# Altium PCB MCU.PcbDoc
Units mil, origin at the board's own origin, x right, y up, seen from the top; angles counter-clockwise.
Board outline 2250 x 3635 mil, 2 copper layers (Top Layer, Bottom Layer); 21 components, 89 nets, 325 pads, 0 vias.
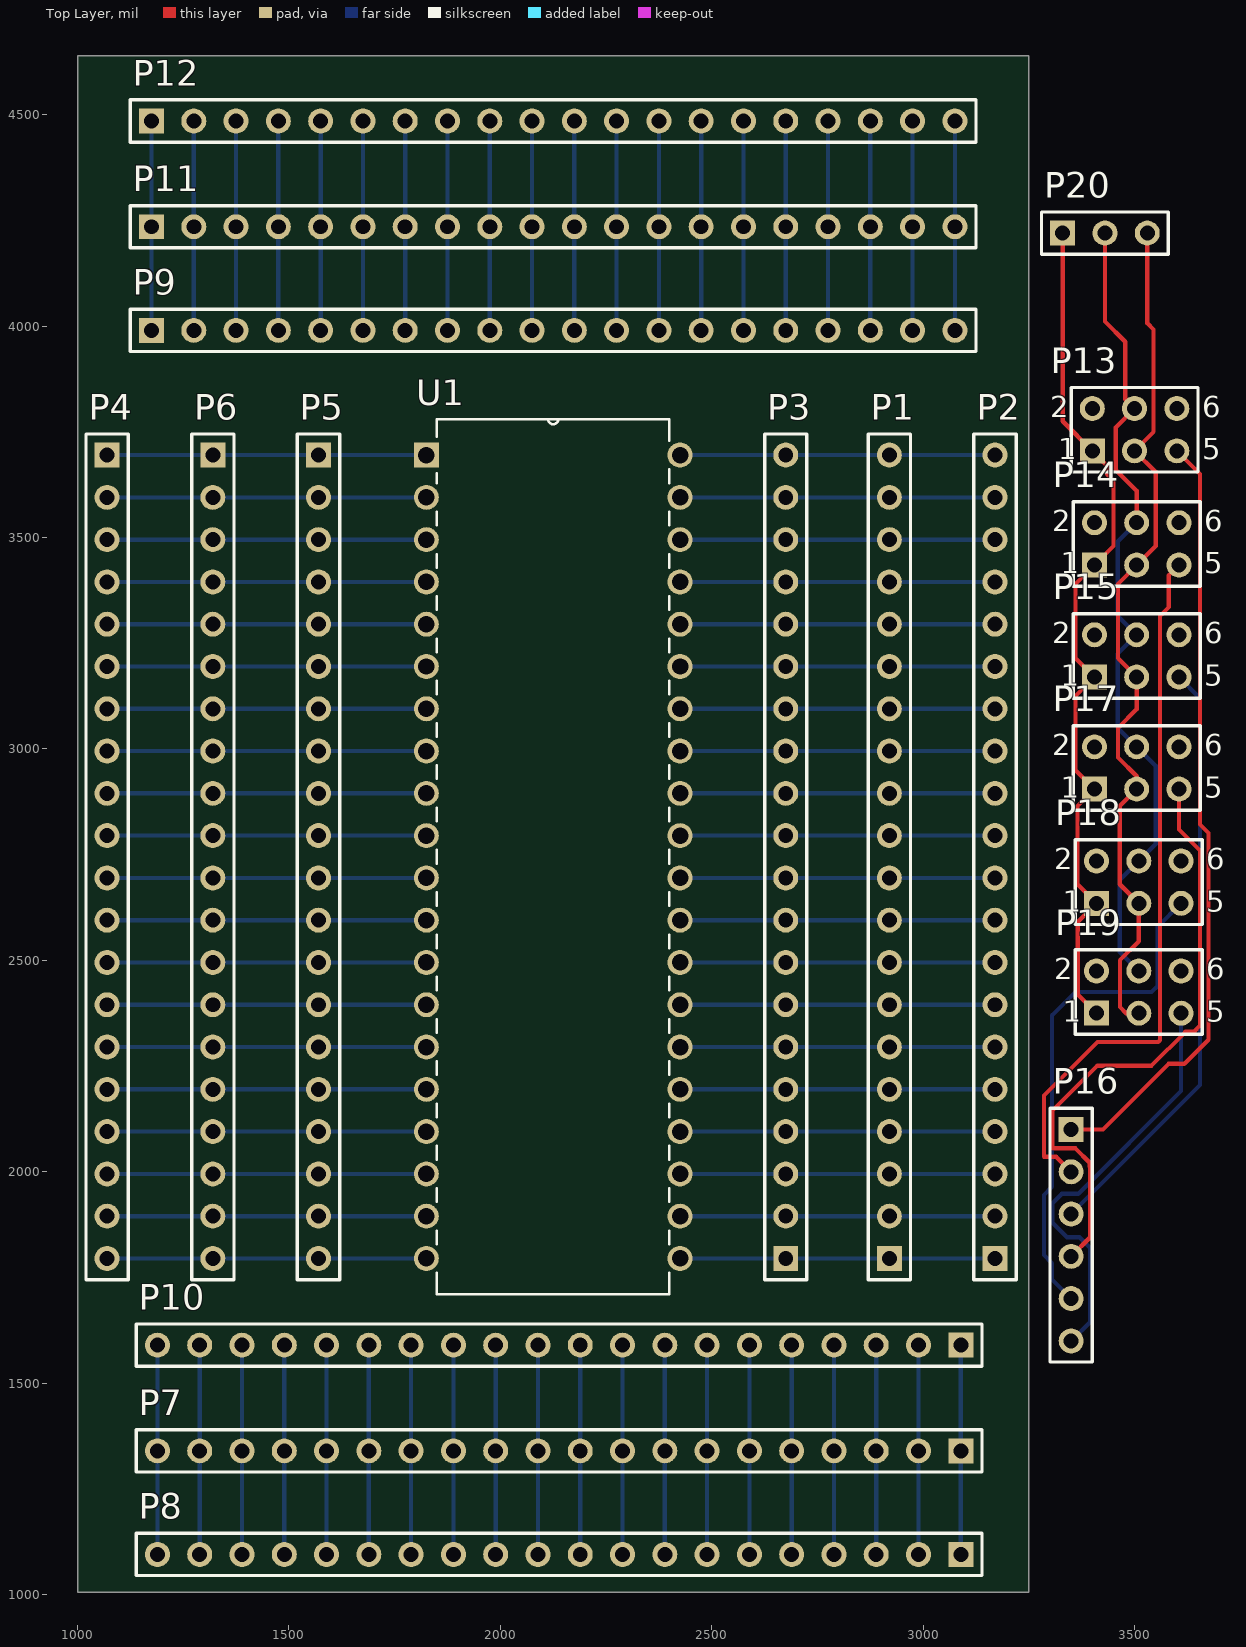
[diagram p0: Top Layer view]
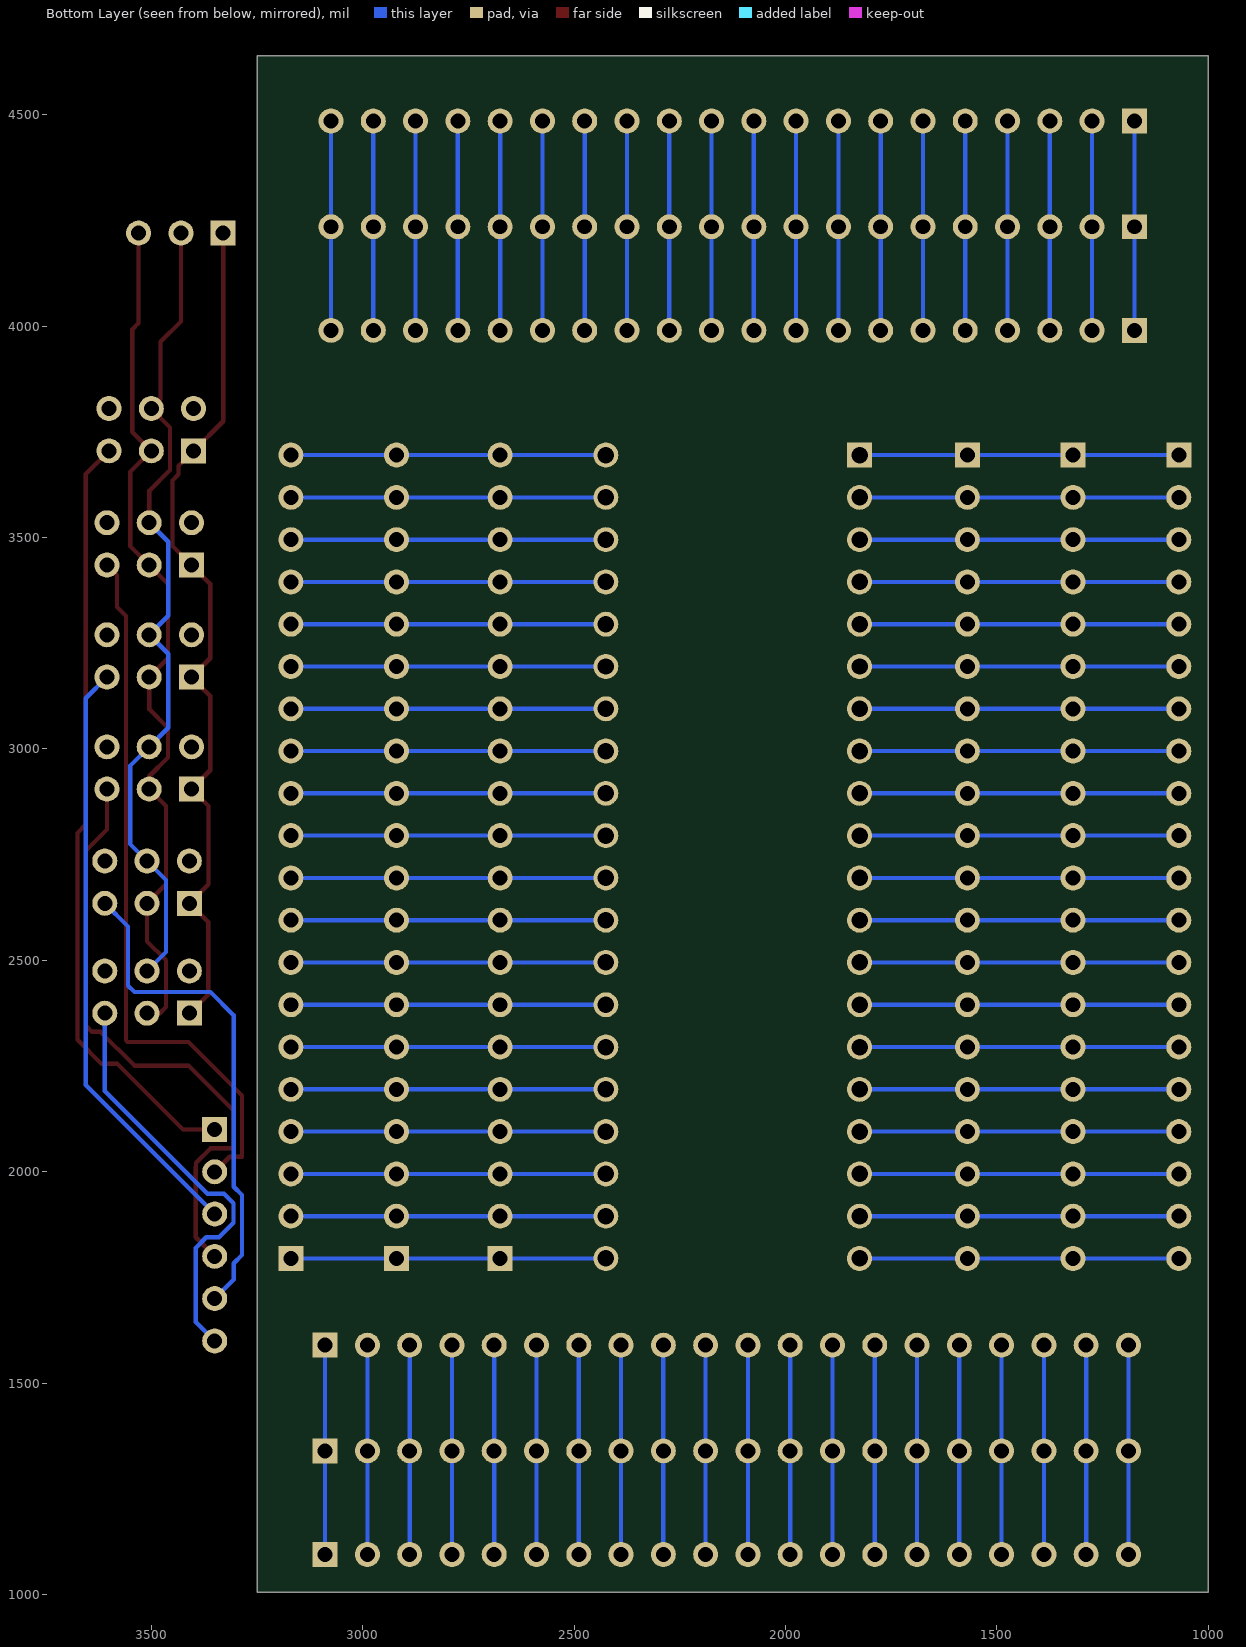
[diagram p1: Bottom Layer view, seen from below]

## Layer stack, top to bottom
Top Solder: solder mask 0.4, Solder Resist, Dk 3.5
Top Layer: signal copper 1.4
Dielectric 1: dielectric 12.6, FR-4, Dk 4.8
Bottom Layer: signal copper 1.4
Bottom Solder: solder mask 0.4, Solder Resist, Dk 3.5

## Board outline
1000,1005 1000,4640 3250,4640 3250,1005

## Design rules (kind name [scope] priority, off if disabled: settings)
Clearance [All] p1: gap=10
PolygonConnect [All] p1: connectstyle=Relief reliefconductorwidth=10 reliefentries=4 polygonreliefangle="90 Angle" airgapwidth=10
RoomDefinition MCU [InComponentClass('MCU')] p1: confinementstyle=ConfineIn formatcopy=TRUE lockcomponents=FALSE outline 1000,1030 3805,1030 3805,4650 1000,4650
RoutingVias [All] p1: holewidth=28 width=50 viastyle="Through Hole" minholewidth=28 minwidth=50 maxholewidth=28 maxwidth=50
SolderMaskExpansion [All] p1: expansion=4
Width [All] p1: maxlimit=10 minlimit=10 preferedwidth=10
30 further rules are at their usual default settings.

## Components (designator, comment, footprint, x,y, rotation, side; value= is the part's Value field where it differs from the comment)
P1 "Header 20" HDR1X20 2920,1795 r90 top
P2 "Header 20" HDR1X20 3170,1795 r90 top
P3 "Header 20" HDR1X20 2675,1795 r90 top
P4 "Header 20" HDR1X20 1070,3695 r270 top
P5 "Header 20" HDR1X20 1570,3695 r270 top
P6 "Header 20" HDR1X20 1320,3695 r270 top
P7 "Header 20" HDR1X20 3089,1340 r180 top
P8 "Header 20" HDR1X20 3089,1095 r180 top
P9 "Header 20" HDR1X20 1175,3990 r0 top
P10 "Header 20" HDR1X20 3089,1590 r180 top
P11 "Header 20" HDR1X20 1175,4235 r0 top
P12 "Header 20" HDR1X20 1175,4485 r0 top
P13 "Header 3X2" HDR2X3 3400,3705 r0 top
P14 "Header 3X2" HDR2X3 3405,3435 r0 top
P15 "Header 3X2" HDR2X3 3405,3170 r0 top
P16 "Header 6" HDR1X6 3350,2100 r270 top
P17 "Header 3X2" HDR2X3 3405,2905 r0 top
P18 "Header 3X2" HDR2X3 3410,2635 r0 top
P19 "Header 3X2" HDR2X3 3410,2375 r0 top
P20 "Header 3" HDR1X3 3330,4220 r0 top
U1 "ATMEGA1284P-PU" DIP254P1524X483-40_ATMEGA1284P-PU(Primary) 2425,1795 r0 top

## Footprints (in the part's own frame and the unit in brackets; to place one, negate y for a bottom-side part, rotate by r counter-clockwise, add the part's x,y. Pads: shape width x height; smd on the part's side, far side on the other; paste and mask are expansions set on the pad)
DIP254P1524X483-40_ATMEGA1284P-PU(Primary) [mil]
  rect 59x59 hole 39 mask-1000: 1(-600,1900)
  round 59 hole 39 mask-1000: 2(-600,1800) 3(-600,1700) 4(-600,1600) 5(-600,1500) 6(-600,1400) 7(-600,1300) 9(-600,1100) 10(-600,1000) 11(-600,900) 12(-600,800) 13(-600,700) 14(-600,600) 15(-600,500) 16(-600,400) 17(-600,300) 18(-600,200) 19(-600,100) 20(-600,0) 21(0,0) 22(0,100) 23(0,200) 24(0,300) 25(0,400) 26(0,500) 27(0,600) 28(0,700) 29(0,800) 30(0,900) 31(0,1000) 32(0,1100) 33(0,1200) 34(0,1300) 35(0,1400) 36(0,1500) 37(0,1600) 38(0,1700) 39(0,1800) 40(0,1900)
  round 59 hole 39: 8(-600,1200)
  silkscreen extent -575,-85 -25,1985
HDR1X3 [mm] "Connector; Header; 3 Position"
  rect 1.5x1.5 hole 0.9: 1(0,0)
  round 1.5 hole 0.9: 2(2.54,0) 3(5.08,0)
  silkscreen extent -1.27,-1.27 6.35,1.27
HDR1X6 [mm] "Connector; Header; 6 Position"
  rect 1.5x1.5 hole 0.9: 1(0,0)
  round 1.5 hole 0.9: 2(2.54,0) 3(5.08,0) 4(7.62,0) 5(10.16,0) 6(12.7,0)
  silkscreen extent -1.27,-1.27 13.97,1.27
HDR1X20 [mm] "Connector; Header; 20 Position"
  rect 1.5x1.5 hole 0.9: 1(0,0)
  round 1.5 hole 0.9: 2(2.54,0) 3(5.08,0) 4(7.62,0) 5(10.16,0) 6(12.7,0) 7(15.24,0) 8(17.78,0) 9(20.32,0) 10(22.86,0) 11(25.4,0) 12(27.94,0) 13(30.48,0) 14(33.02,0) 15(35.56,0) 16(38.1,0) 17(40.64,0) 18(43.18,0) 19(45.72,0) 20(48.26,0)
  silkscreen extent -1.27,-1.27 49.53,1.27
HDR2X3 [mm] "Connector; Header; 3x2 Position"
  rect 1.5x1.5 hole 0.9: 1(0,0)
  round 1.5 hole 0.9: 2(0,2.54) 3(2.54,0) 4(2.54,2.54) 5(5.08,0) 6(5.08,2.54)
  silkscreen extent -1.27,-1.27 6.35,3.81

## Part data
P1 P2 P3 P4 P5 P6 P7 P8 P9 P10 P11 P12: "Header, 20-Pin"
P13 P14 P15 P17 P18 P19: "Header, 3-Pin, Dual row"
P16: "Header, 6-Pin"
P20: "Header, 3-Pin"

## Nets (pads, with @x,y where several pads share a name; then routed paths per layer and width w, separated by ;. In a path a pad name is that pad's centre, name@x,y a point inside that pad or via, vN(x,y) a via of type N, cw(c..) or ccw(c..) an arc to the next point about the centre after c; other vN are vias at no path point)
NetP1_1: P1.1 P2.1 P3.1 U1.21 | length 745
  Bottom Layer w10: U1.21 P3.1 P1.1 P2.1
NetP1_2: P1.2 P2.2 P3.2 | length 495
  Bottom Layer w10: P3.2 P1.2 P2.2
NetP1_3: P1.3 P2.3 P3.3 U1.23 | length 745
  Bottom Layer w10: U1.23 P3.3 P1.3 P2.3
NetP1_4: P1.4 P2.4 P3.4 U1.24 | length 745
  Bottom Layer w10: U1.24 P3.4 P1.4 P2.4
NetP1_5: P1.5 P2.5 P3.5 U1.25 | length 745
  Bottom Layer w10: U1.25 P3.5 P1.5 P2.5
NetP1_6: P1.6 P2.6 P3.6 U1.26 | length 745
  Bottom Layer w10: U1.26 P3.6 P1.6 P2.6
NetP1_7: P1.7 P2.7 P3.7 | length 495
  Bottom Layer w10: P3.7 P1.7 P2.7
NetP1_8: P1.8 P2.8 P3.8 U1.28 | length 745
  Bottom Layer w10: U1.28 P3.8 P1.8 P2.8
NetP1_9: P1.9 P2.9 P3.9 U1.29 | length 745
  Bottom Layer w10: U1.29 P3.9 P1.9 P2.9
NetP1_10: P1.10 P2.10 P3.10 U1.30 | length 745
  Bottom Layer w10: U1.30 P3.10 P1.10 P2.10
NetP1_11: P1.11 P2.11 P3.11 U1.31 | length 745
  Bottom Layer w10: U1.31 P3.11 P1.11 P2.11
NetP1_12: P1.12 P2.12 P3.12 U1.32 | length 745
  Bottom Layer w10: U1.32 P3.12 P1.12 P2.12
NetP1_13: P1.13 P2.13 P3.13 U1.33 | length 745
  Bottom Layer w10: U1.33 P3.13 P1.13 P2.13
NetP1_14: P1.14 P2.14 P3.14 U1.34 | length 745
  Bottom Layer w10: U1.34 P3.14 P1.14 P2.14
NetP1_15: P1.15 P2.15 P3.15 U1.35 | length 745
  Bottom Layer w10: U1.35 P3.15 P1.15 P2.15
NetP1_16: P1.16 P2.16 P3.16 U1.36 | length 745
  Bottom Layer w10: U1.36 P3.16 P1.16 P2.16
NetP1_17: P1.17 P2.17 P3.17 U1.37 | length 745
  Bottom Layer w10: U1.37 P3.17 P1.17 P2.17
NetP1_18: P1.18 P2.18 P3.18 | length 495
  Bottom Layer w10: P3.18 P1.18 P2.18
NetP1_19: P1.19 P2.19 P3.19 U1.39 | length 745
  Bottom Layer w10: U1.39 P3.19 P1.19 P2.19
NetP1_20: P1.20 P2.20 P3.20 | length 495
  Bottom Layer w10: P3.20 P1.20 P2.20
NetP4_1: P4.1 P5.1 P6.1 U1.1 | length 755
  Bottom Layer w10: P4.1 P6.1 P5.1 U1.1
NetP4_2: P4.2 P5.2 P6.2 U1.2 | length 755
  Bottom Layer w10: P4.2 P6.2 P5.2 U1.2
NetP4_3: P4.3 P5.3 P6.3 | length 500
  Bottom Layer w10: P4.3 P6.3 P5.3
NetP4_4: P4.4 P5.4 P6.4 U1.4 | length 755
  Bottom Layer w10: P4.4 P6.4 P5.4 U1.4
NetP4_5: P4.5 P5.5 P6.5 U1.5 | length 755
  Bottom Layer w10: P4.5 P6.5 P5.5 U1.5
NetP4_6: P4.6 P5.6 P6.6 | length 500
  Bottom Layer w10: P4.6 P6.6 P5.6
NetP4_7: P4.7 P5.7 P6.7 U1.7 | length 755
  Bottom Layer w10: P4.7 P6.7 P5.7 U1.7
NetP4_8: P4.8 P5.8 P6.8 | length 500
  Bottom Layer w10: P4.8 P6.8 P5.8
NetP4_9: P4.9 P5.9 P6.9 U1.9 | length 755
  Bottom Layer w10: P4.9 P6.9 P5.9 U1.9
NetP4_10: P4.10 P5.10 P6.10 U1.10 | length 755
  Bottom Layer w10: P4.10 P6.10 P5.10 U1.10
NetP4_11: P4.11 P5.11 P6.11 | length 500
  Bottom Layer w10: P4.11 P6.11 P5.11
NetP4_12: P4.12 P5.12 P6.12 | length 500
  Bottom Layer w10: P4.12 P6.12 P5.12
NetP4_13: P4.13 P5.13 P6.13 | length 500
  Bottom Layer w10: P4.13 P6.13 P5.13
NetP4_14: P4.14 P5.14 P6.14 U1.14 | length 755
  Bottom Layer w10: P4.14 P6.14 P5.14 U1.14
NetP4_15: P4.15 P5.15 P6.15 U1.15 | length 755
  Bottom Layer w10: P4.15 P6.15 P5.15 U1.15
NetP4_16: P4.16 P5.16 P6.16 | length 500
  Bottom Layer w10: P4.16 P6.16 P5.16
NetP4_17: P4.17 P5.17 P6.17 U1.17 | length 755
  Bottom Layer w10: P4.17 P6.17 P5.17 U1.17
NetP4_18: P4.18 P5.18 P6.18 U1.18 | length 755
  Bottom Layer w10: P4.18 P6.18 P5.18 U1.18
NetP4_19: P4.19 P5.19 P6.19 U1.19 | length 755
  Bottom Layer w10: P4.19 P6.19 P5.19 U1.19
NetP4_20: P4.20 P5.20 P6.20 | length 500
  Bottom Layer w10: P4.20 P6.20 P5.20
NetP7_1: P7.1 P8.1 P10.1 | length 495
  Bottom Layer w10: P8.1 P7.1 P10.1
NetP7_2: P7.2 P8.2 P10.2 | length 495
  Bottom Layer w10: P8.2 P7.2 P10.2
NetP7_3: P7.3 P8.3 P10.3 | length 495
  Bottom Layer w10: P8.3 P7.3 P10.3
NetP7_4: P7.4 P8.4 P10.4 | length 495
  Bottom Layer w10: P8.4 P7.4 P10.4
NetP7_5: P7.5 P8.5 P10.5 | length 495
  Bottom Layer w10: P8.5 P7.5 P10.5
NetP7_6: P7.6 P8.6 P10.6 | length 495
  Bottom Layer w10: P8.6 P7.6 P10.6
NetP7_7: P7.7 P8.7 P10.7 | length 495
  Bottom Layer w10: P8.7 P7.7 P10.7
NetP7_8: P7.8 P8.8 P10.8 | length 495
  Bottom Layer w10: P8.8 P7.8 P10.8
NetP7_9: P7.9 P8.9 P10.9 | length 495
  Bottom Layer w10: P8.9 P7.9 P10.9
NetP7_10: P7.10 P8.10 P10.10 | length 495
  Bottom Layer w10: P8.10 P7.10 P10.10
NetP7_11: P7.11 P8.11 P10.11 | length 495
  Bottom Layer w10: P8.11 P7.11 P10.11
NetP7_12: P7.12 P8.12 P10.12 | length 495
  Bottom Layer w10: P8.12 P7.12 P10.12
NetP7_13: P7.13 P8.13 P10.13 | length 495
  Bottom Layer w10: P8.13 P7.13 P10.13
NetP7_14: P7.14 P8.14 P10.14 | length 495
  Bottom Layer w10: P8.14 P7.14 P10.14
NetP7_15: P7.15 P8.15 P10.15 | length 495
  Bottom Layer w10: P8.15 P7.15 P10.15
NetP7_16: P7.16 P8.16 P10.16 | length 495
  Bottom Layer w10: P8.16 P7.16 P10.16
NetP7_17: P7.17 P8.17 P10.17 | length 495
  Bottom Layer w10: P8.17 P7.17 P10.17
NetP7_18: P7.18 P8.18 P10.18 | length 495
  Bottom Layer w10: P8.18 P7.18 P10.18
NetP7_19: P7.19 P8.19 P10.19 | length 495
  Bottom Layer w10: P8.19 P7.19 P10.19
NetP7_20: P7.20 P8.20 P10.20 | length 495
  Bottom Layer w10: P8.20 P7.20 P10.20
NetP9_1: P9.1 P11.1 P12.1 | length 495
  Bottom Layer w10: P9.1 P11.1 P12.1
NetP9_2: P9.2 P11.2 P12.2 | length 495
  Bottom Layer w10: P9.2 P11.2 P12.2
NetP9_3: P9.3 P11.3 P12.3 | length 495
  Bottom Layer w10: P9.3 P11.3 P12.3
NetP9_4: P9.4 P11.4 P12.4 | length 495
  Bottom Layer w10: P9.4 P11.4 P12.4
NetP9_5: P9.5 P11.5 P12.5 | length 495
  Bottom Layer w10: P9.5 P11.5 P12.5
NetP9_6: P9.6 P11.6 P12.6 | length 495
  Bottom Layer w10: P9.6 P11.6 P12.6
NetP9_7: P9.7 P11.7 P12.7 | length 495
  Bottom Layer w10: P9.7 P11.7 P12.7
NetP9_8: P9.8 P11.8 P12.8 | length 495
  Bottom Layer w10: P9.8 P11.8 P12.8
NetP9_9: P9.9 P11.9 P12.9 | length 495
  Bottom Layer w10: P9.9 P11.9 P12.9
NetP9_10: P9.10 P11.10 P12.10 | length 495
  Bottom Layer w10: P9.10 P11.10 P12.10
NetP9_11: P9.11 P11.11 P12.11 | length 495
  Bottom Layer w10: P9.11 P11.11 P12.11
NetP9_12: P9.12 P11.12 P12.12 | length 495
  Bottom Layer w10: P9.12 P11.12 P12.12
NetP9_13: P9.13 P11.13 P12.13 | length 495
  Bottom Layer w10: P9.13 P11.13 P12.13
NetP9_14: P9.14 P11.14 P12.14 | length 495
  Bottom Layer w10: P9.14 P11.14 P12.14
NetP9_15: P9.15 P11.15 P12.15 | length 495
  Bottom Layer w10: P9.15 P11.15 P12.15
NetP9_16: P9.16 P11.16 P12.16 | length 495
  Bottom Layer w10: P9.16 P11.16 P12.16
NetP9_17: P9.17 P11.17 P12.17 | length 495
  Bottom Layer w10: P9.17 P11.17 P12.17
NetP9_18: P9.18 P11.18 P12.18 | length 495
  Bottom Layer w10: P9.18 P11.18 P12.18
NetP9_19: P9.19 P11.19 P12.19 | length 495
  Bottom Layer w10: P9.19 P11.19 P12.19
NetP9_20: P9.20 P11.20 P12.20 | length 495
  Bottom Layer w10: P9.20 P11.20 P12.20
NetP13_1: P13.1 P14.1 P15.1 P17.1 P18.1 P19.1 P20.1 | length 2059.2
  Top Layer w10: P20.1 3330,3775 P13.1 3435.47,3669.53 3435.47,3649.53 3450,3635 3450,3480 P14.1 3360.47,3390.47 3360.47,3214.53 P15.1 3360.47,3125.47 3360.47,2949.53 P17.1 3365,2865 3365,2680 P18.1 3365.47,2590.47 3365.47,2419.53 P19.1
NetP13_3: P13.3 P14.3 P15.3 P17.3 P18.3 P19.3 P20.3 | length 2072.6
  Top Layer w10: P19.3 3480,2375 3465.47,2389.53 3465.47,2500.47 3510,2545 P18.3 3465,2680 3465,2865 P17.3 3505,2935.47 3460.47,2980 3460.47,3049.53 3505,3094.06 P15.3 3460.47,3214.53 3460.47,3390.47 P14.3 3550,3480 3550,3655 P13.3 3545,3750 3545,3992 3530,4007 P20.3
NetP13_4: P13.4 P14.4 P15.4 P17.4 P18.4 P19.4 P20.2 | length 1960
  Top Layer w10: P20.2 3430,4011 3478,3963 3478,3827 P13.4 3455.47,3760.47 3455.47,3660 3505,3610.47 P14.4
  Bottom Layer w10: P14.4 3460,3490 3460,3315 P15.4 3460,3225 3460,3050 P17.4 3550,2960 3550,2775 P18.4 3465,2690 3465,2520 P19.4
NetP13_5: P13.5 P16.1 | length 1836
  Top Layer w10: P16.1 3425,2100 3580.28,2255.28 3617.42,2255.28 3674.53,2312.39 3674.53,2801.5 3655,2821.03 3655,3650 P13.5
NetP14_5: P14.5 P16.2 | length 1695.5
  Top Layer w10: P16.2 3314.53,2035.47 3285.47,2035.47 3285.47,2180.47 3412.04,2307.04 3556.04,2307.04 3560,2311 3560,3314.53 3581,3335.53 3581,3411 P14.5
NetP15_5: P15.5 P16.3 | length 1417
  Bottom Layer w10: P16.3 3655,2205 3655,3120 P15.5
NetP16_4: P16.4 P17.5 | length 1444.5
  Top Layer w10: P16.4 3395,1845 3395,2011 3394,2012 3394,2021.47 3360,2055.47 3305.47,2055.47 3305.47,2144.53 3411.94,2251 3540,2251 3620,2331 3640,2331 3654.53,2345.53 3654.53,2760 3605,2809.53 P17.5
NetP16_5: P16.5 P18.5 | length 1201.6
  Bottom Layer w10: P16.5 3305,1745 3305,1783.61 3285.47,1803.14 3285.47,1945 3305,1964.53 3305,2370 3360,2425 3540,2425 3555,2440 3555,2580 P18.5
NetP16_6: P16.6 P19.5 | length 997.3
  Bottom Layer w10: P16.6 3395,1645 3395,1820 3370,1845 3340,1845 3305.47,1879.53 3305.47,1925.47 3328,1948 3367,1948 3610,2191 P19.5
pads on no net: P13.2 P13.6 P14.2 P14.6 P15.2 P15.6 P17.2 P17.6 P18.2 P18.6 P19.2 P19.6 U1.3 U1.6 U1.8 U1.11 U1.12 U1.13 U1.16 U1.20 U1.22 U1.27 U1.38 U1.40
copper on no net: | length 3034
  Bottom Layer w10: 1570,1795 1825,1795 ; 1570,2195 1825,2195 ; 1570,2495 1825,2495 ; 1570,2595 1825,2595 ; 1570,2695 1825,2695 ; 1570,2995 1825,2995 ; 1570,3195 1825,3195 ; 1570,3495 1825,3495 ; 2425,1895 2675,1895 ; 2425,2395 2675,2395 ; 2425,3495 2669,3495 ; 2425,3695 2675,3695

## Text inside footprints (layer, text, board x,y; h text height)
P13: Top Overlay "6" at 3660,3785 h50; Top Overlay "5" at 3660,3685 h50; Top Overlay "2" at 3300,3785 h50; Top Overlay "1" at 3320,3685 h50
P14: Top Overlay "6" at 3665,3515 h50; Top Overlay "5" at 3665,3415 h50; Top Overlay "2" at 3305,3515 h50; Top Overlay "1" at 3325,3415 h50
P15: Top Overlay "6" at 3665,3250 h50; Top Overlay "5" at 3665,3150 h50; Top Overlay "2" at 3305,3250 h50; Top Overlay "1" at 3325,3150 h50
P17: Top Overlay "6" at 3665,2985 h50; Top Overlay "5" at 3665,2885 h50; Top Overlay "2" at 3305,2985 h50; Top Overlay "1" at 3325,2885 h50
P18: Top Overlay "6" at 3670,2715 h50; Top Overlay "5" at 3670,2615 h50; Top Overlay "2" at 3310,2715 h50; Top Overlay "1" at 3330,2615 h50
P19: Top Overlay "6" at 3670,2455 h50; Top Overlay "5" at 3670,2355 h50; Top Overlay "2" at 3310,2455 h50; Top Overlay "1" at 3330,2355 h50